# EAGLE board 8chRelay_Arduinonano (EAGLE 9.1.0)
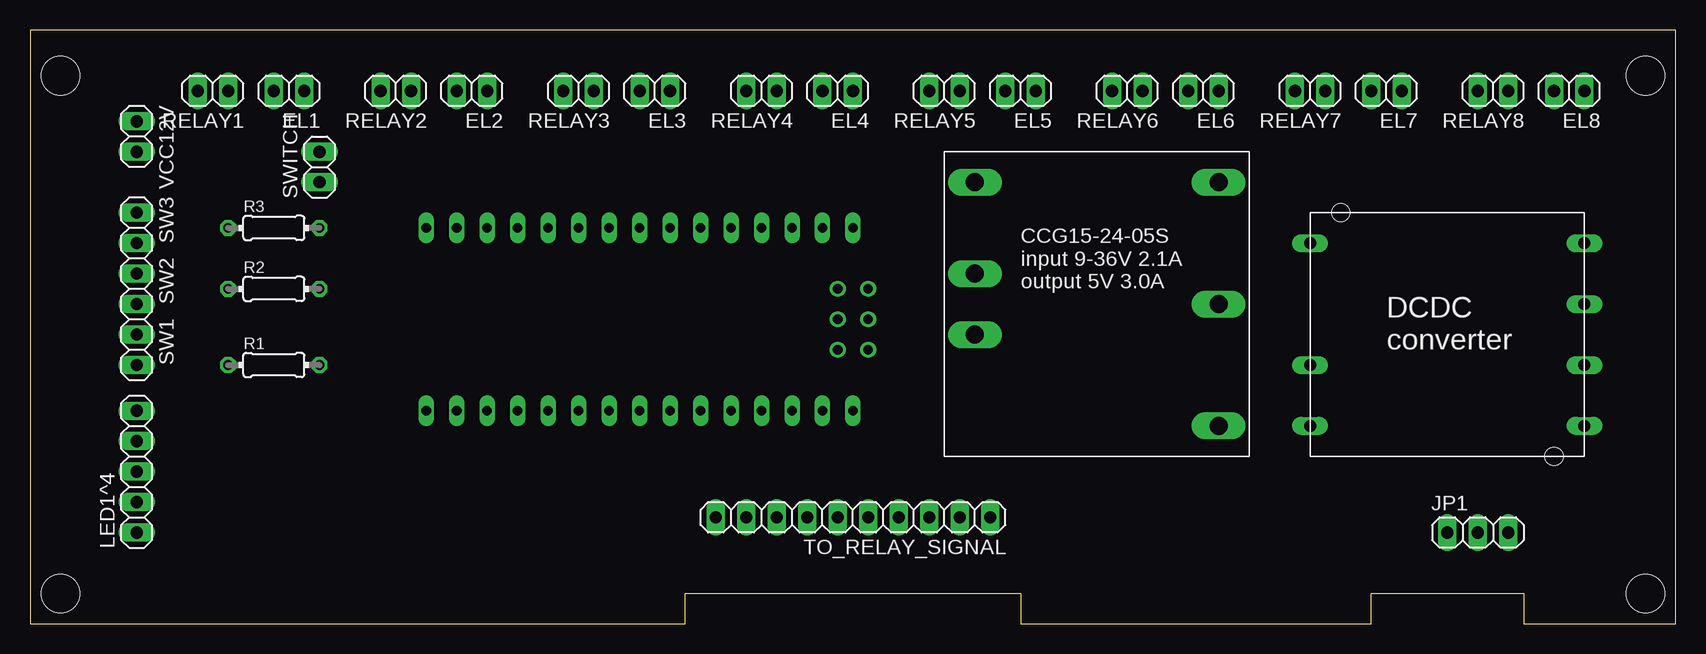
[diagram p0: board, top side]
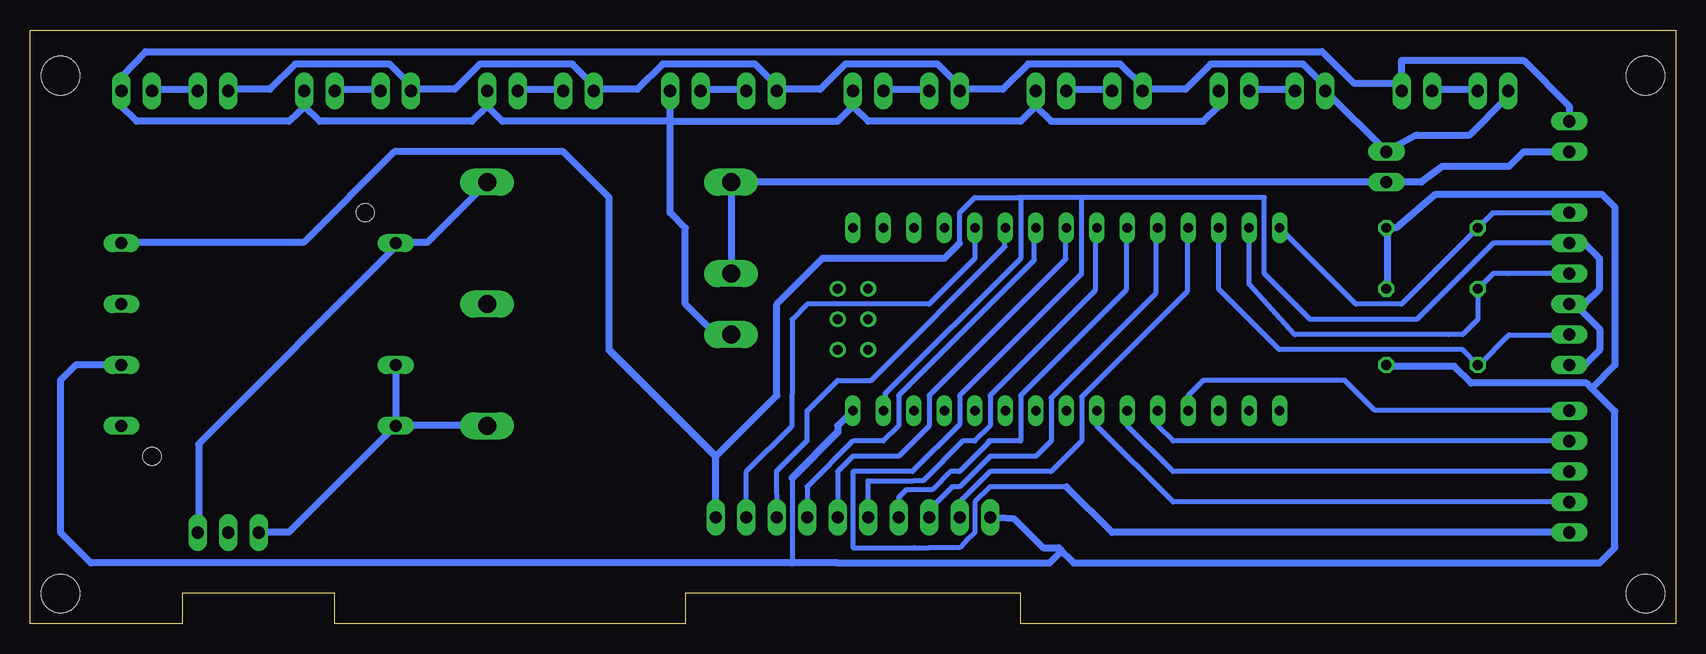
[diagram p1: board, bottom side, seen from below]

Size 137.16 x 49.53 mm. Coordinates in mm from the lower left corner, seen from the top.
Outline: 137.16,0 137.16,49.53 0,49.53 0,0 54.61,0 54.61,2.54 82.55,2.54 82.55,0 111.76,0 111.76,2.54 123.19,2.54 124.46,2.54 124.46,0 137.16,0
Copper layers (1*16): Top 0.035mm / dielectric 1.5mm / Bottom 0.035mm
Design rules "default": minimum track width 6mil, minimum drill 0.35mm, track to track 6mil, track to pad 6mil, pad to pad 6mil, via to via 6mil, smd to smd 6mil, copper to edge 40mil, drill to drill 6mil, minimum pad ring 10mil, minimum via ring 8mil, stop-mask expansion 4mil, vias tented up to drill 0mil, thermal gap 10mil
Net classes: 0 default: width 0.4 mm, clearance 0.3 mm; 1 vcc: width 0.6 mm, clearance 0.4 mm; 2 GND: width 0.6 mm, clearance 0.4 mm
Holes 3.2 mm at 2.54,2.54 2.54,45.72 134.62,2.54 134.62,45.72

## Footprints (pad centres in the part's own frame; a part is rotated, then mirrored left to right if it is on the bottom)
DC_DC_CONVERTER = drill 1 long: +VIN -11.43,6.35; +VOUT 11.43,6.35; -VIN -11.43,-8.89; -VOUT 11.43,-3.81; P$4 11.43,-8.89; RC -11.43,-3.81; TRM 11.43,1.27 | hole 1.5: -8.89,8.89; 8.89,-11.43
1X02 = drill 1.016 long: 1 -1.27,0; 2 1.27,0
1X03 = drill 1.016 long: 1 -2.54,0; 2 0,0; 3 2.54,0
1X05 = drill 1.016 long: 1 -5.08,0; 2 -2.54,0; 3 0,0; 4 2.54,0; 5 5.08,0
0204/7 = drill 0.813 octagon: 1 -3.81,0; 2 3.81,0
1X10 = drill 1.016 long: 1 -11.43,0; 2 -8.89,0; 3 -6.35,0; 4 -3.81,0; 5 -1.27,0; 6 1.27,0; 7 3.81,0; 8 6.35,0; 9 8.89,0; 10 11.43,0
NANO = drill 0.8 long: 3.3V -10.16,24.13; 5V -10.16,-1.27; A0 -10.16,19.05; A1 -10.16,16.51; A2 -10.16,13.97; A3 -10.16,11.43; A4 -10.16,8.89; A5 -10.16,6.35; A6 -10.16,3.81; A7 -10.16,1.27; AREF -10.16,21.59; D2 5.08,1.27; D3 5.08,3.81; D4 5.08,6.35; D5 5.08,8.89; D6 5.08,11.43; D7 5.08,13.97; D8 5.08,16.51; D9 5.08,19.05; D10 5.08,21.59; D11 5.08,24.13; D12 5.08,26.67; D13 -10.16,26.67; GND -10.16,-6.35; GND1 5.08,-1.27; RAW -10.16,-8.89; RST -10.16,-3.81; RST1 5.08,-3.81; RX1 5.08,-6.35; TX0 5.08,-8.89 | drill 0.8: ICSP1 -5.08,-10.16; ICSP2 -5.08,-7.62; ICSP3 -2.54,-10.16; ICSP4 -2.54,-7.62; ICSP5 0,-10.16; ICSP6 0,-7.62
CCG15-24-05S = drill 1.5 long: +VIN -10.16,-1.27; +VOUT 10.16,11.43; -VIN -10.16,3.81; -VOUT 10.16,-8.89; RC -10.16,11.43; TRM 10.16,1.27

## Placement (x,y rotation side)
DC-DC1  DC-DC-CONVERTER  [DC_DC_CONVERTER]  118.11,25.4 0 top
EL1  [1X02]  21.59,44.45 180 top
EL2  [1X02]  36.83,44.45 180 top
EL3  [1X02]  52.07,44.45 180 top
EL4  [1X02]  67.31,44.45 180 top
EL5  [1X02]  82.55,44.45 180 top
EL6  [1X02]  97.79,44.45 180 top
EL7  [1X02]  113.03,44.45 180 top
EL8  [1X02]  128.27,44.45 180 top
JP1  [1X03]  120.65,7.62 0 top
LED1^4  [1X05]  8.89,12.7 90 top
R1  10k  [0204/7]  20.32,21.59 0 top
R2  10k  [0204/7]  20.32,27.94 0 top
R3  10k  [0204/7]  20.32,33.02 0 top
RELAY1  [1X02]  15.24,44.45 180 top
RELAY2  [1X02]  30.48,44.45 180 top
RELAY3  [1X02]  45.72,44.45 180 top
RELAY4  [1X02]  60.96,44.45 180 top
RELAY5  [1X02]  76.2,44.45 180 top
RELAY6  [1X02]  91.44,44.45 180 top
RELAY7  [1X02]  106.68,44.45 180 top
RELAY8  [1X02]  121.92,44.45 180 top
SW1  [1X02]  8.89,22.86 270 top
SW2  [1X02]  8.89,27.94 270 top
SW3  [1X02]  8.89,33.02 270 top
SWITCH  [1X02]  24.13,38.1 90 top
TO_RELAY_SIGNAL  [1X10]  68.58,8.89 180 top
U$1  NANO  [NANO]  59.69,27.94 90 top
U$2  CCG15-24-05S  [CCG15-24-05S]  88.9,25.4 0 top
VCC12V  [1X02]  8.89,40.64 270 top

## Library data of the parts
DC-DC1 = dc-dc-converter_CC6-0505SF-E
EL1-EL8 JP1 LED1^4 RELAY1-RELAY8 SW1-SW3 SWITCH TO_RELAY_SIGNAL VCC12V = pinhead
R1-R3 = rcl; SPICEPREFIX: R
U$1 = Arduino-clone
U$2 = dc-dc-converter_CCG15-24-05S

## Nets
N$1 [vcc]: RELAY1.2 RELAY2.2 RELAY3.2 RELAY4.2 RELAY5.2 RELAY6.2 RELAY7.2 RELAY8.2 SWITCH.2
N$2 [GND]: EL1.2 RELAY1.1
N$3 [GND]: EL2.2 RELAY2.1
N$4 [GND]: EL3.2 RELAY3.1
N$5 [GND]: EL4.2 RELAY4.1
N$6 [GND]: EL5.2 RELAY5.1
N$7 [GND]: EL6.2 RELAY6.1
N$8 [GND]: EL7.2 RELAY7.1
N$9 [GND]: EL8.2 RELAY8.1
N$10 [GND]: EL1.1 EL2.1 EL3.1 EL4.1 EL5.1 EL6.1 EL7.1 EL8.1 U$2.+VIN VCC12V.1
N$11 [GND]: DC-DC1.-VIN DC-DC1.RC JP1.1 U$2.-VOUT
N$12 [vcc]: SWITCH.1 U$2.-VIN U$2.RC VCC12V.2
N$13: TO_RELAY_SIGNAL.2 U$1.D2
N$14: TO_RELAY_SIGNAL.3 U$1.D3
N$15: TO_RELAY_SIGNAL.4 U$1.D4
N$16: TO_RELAY_SIGNAL.5 U$1.D5
N$17: TO_RELAY_SIGNAL.6 U$1.D6
N$18: TO_RELAY_SIGNAL.7 U$1.D7
N$19: TO_RELAY_SIGNAL.8 U$1.D8
N$20: TO_RELAY_SIGNAL.9 U$1.D9
N$21: R3.1 SW3.1 U$1.D12
N$22: R2.1 SW2.1 U$1.D11
N$23: R1.1 SW1.1 U$1.D10
N$24: LED1^4.5 U$1.A0
N$25: LED1^4.4 U$1.A1
N$26: LED1^4.3 U$1.A2
N$27: LED1^4.2 U$1.A3
N$28: DC-DC1.+VOUT LED1^4.1 SW1.2 SW2.2 SW3.2 TO_RELAY_SIGNAL.1 U$1.GND
N$29: DC-DC1.-VOUT R1.2 R2.2 R3.2 TO_RELAY_SIGNAL.10 U$1.RAW
N$32 [GND]: DC-DC1.+VIN JP1.3 U$2.+VOUT

## Tracks (layer width: path | path; a pad name or v marks a point on that pad's centre or on a via)
N$1
  Bottom 0.6: RELAY1.2 14.09,44.41 14.09,43.88 17.2,40.77 21.63,40.77 SWITCH.2 24.24,39.51 29.14,44.41 RELAY2.2 29.14,44.76 31.07,46.68 38.77,46.68 40.87,44.58 44.37,44.58 RELAY3.2 44.37,44.76 46.29,46.68 53.99,46.68 56.09,44.58 59.59,44.58 RELAY4.2 59.59,44.76 61.52,46.68 69.22,46.68 71.31,44.58 74.81,44.58 RELAY5.2 74.81,44.76 76.74,46.68 84.44,46.68 86.54,44.58 90.04,44.58 RELAY6.2 90.04,44.76 91.97,46.68 99.67,46.68 101.77,44.58 105.27,44.58 RELAY7.2 105.27,44.76 107.19,46.68 115.06,46.68 117.17,44.58 120.49,44.58 RELAY8.2
N$2
  Bottom 0.6: RELAY1.1 16.54,44.58 20.21,44.58 EL1.2
N$3
  Bottom 0.6: RELAY2.1 31.77,44.58 35.44,44.58 EL2.2
N$4
  Bottom 0.6: RELAY3.1 46.99,44.58 50.66,44.58 EL3.2
N$5
  Bottom 0.6: RELAY4.1 62.39,44.58 65.89,44.58 EL4.2
N$6
  Bottom 0.6: RELAY5.1 77.61,44.58 81.11,44.58 EL5.2
N$7
  Bottom 0.6: RELAY6.1 92.84,44.58 96.52,44.58 EL6.2
N$8
  Bottom 0.6: RELAY7.1 108.06,44.58 111.74,44.58 EL7.2
N$9
  Bottom 0.6: RELAY8.1 123.29,44.58 126.97,44.58 EL8.2
N$10
  Bottom 0.6: 53.34,43.18 52.07,41.91 39.37,41.91 38.1,43.18 EL2.1 | EL3.1 53.34,43.18 | 68.58,43.18 67.31,41.91 54.61,41.91 53.34,43.18 | VCC12V.1 8.89,43.18 12.7,46.99 22.86,46.99 EL1.1 23.02,45.1 26.86,45.1 29.49,47.73 127.53,47.73 129.43,45.72 129.54,45.72 EL8.1 129.54,43.18 128.27,41.91 115.57,41.91 114.27,43.15 114.3,43.18 | 83.82,41.91 83.82,34.29 82.55,33.02 82.55,26.67 80.01,24.13 U$2.+VIN | 83.82,41.91 EL5.1 | 83.82,41.91 97.79,41.91 98.97,43.09 98.97,44.41 EL6.1 99.06,43.18 100.33,41.91 113.03,41.91 114.3,43.18 | 68.58,43.18 69.85,41.91 83.82,41.91 | 114.3,43.18 EL7.1 | 68.58,43.18 EL4.1
N$11
  Bottom 0.6: DC-DC1.-VIN 106.67,16.58 106.67,21.48 DC-DC1.RC | JP1.1 118.04,7.66 115.59,7.66 106.84,16.41 DC-DC1.-VIN | U$2.-VOUT 99.14,16.58 106.49,16.58 DC-DC1.-VIN
N$12
  Bottom 0.6: VCC12V.2 12.7,39.37 13.92,38.15 19.49,38.15 21.21,36.83 SWITCH.1 U$2.RC U$2.-VIN
N$13
  Bottom 0.4: U$1.D2 58.42,30.48 62.23,26.67 72.39,26.67 73.66,25.4 73.66,19.12 73.66,16.51 77.47,12.7 TO_RELAY_SIGNAL.2
N$14
  Bottom 0.4: U$1.D3 55.91,32.85 55.91,31.45 67.05,20.32 69.85,20.32 72.39,17.78 72.39,15.28 74.95,12.72 TO_RELAY_SIGNAL.3
N$15
  Bottom 0.4: U$1.D4 53.47,32.85 53.47,30.36 64.77,19.05 64.77,16.51 66.04,15.24 68.58,15.24 72.39,11.43 TO_RELAY_SIGNAL.4
N$16
  Bottom 0.4: U$1.D5 50.84,32.85 50.84,30.44 62.23,19.05 62.23,16.51 64.77,13.97 68.58,13.97 69.85,12.7 TO_RELAY_SIGNAL.5
N$17
  Bottom 0.4: U$1.D6 48.39,32.85 48.39,27.81 57.15,19.05 57.15,16.51 58.42,15.24 59.44,15.24 62.74,11.94 63.5,11.94 67.31,11.94 TO_RELAY_SIGNAL.6
N$18
  Bottom 0.4: U$1.D7 45.77,32.85 45.77,27.89 54.61,19.05 54.61,15.24 57.15,15.24 | 57.15,15.24 57.28,15.24 | TO_RELAY_SIGNAL.7 64.77,10.54 64.14,11.18 61.98,11.18 60.45,12.7 59.69,12.7 57.15,15.24
N$19
  Bottom 0.4: U$1.D8 43.31,32.85 43.31,27.61 52.06,18.86 52.06,15.24 53.34,13.97 57.15,13.97 59.69,11.43 60.33,11.43 62.23,9.53 TO_RELAY_SIGNAL.8
N$20
  Bottom 0.4: U$1.D9 40.69,32.85 40.69,27.78 49.53,18.94 49.53,15.24 52.07,12.7 57.15,12.7 59.69,10.16 TO_RELAY_SIGNAL.9 59.73,9.05
N$21
  Bottom 0.4: U$1.D12 32.99,32.85 32.85,32.85 26.67,26.67 22.86,26.67 R3.1 15.24,34.29 SW3.1
N$22
  Bottom 0.4: 18.96,24.13 31.75,24.13 35.56,28.34 U$1.D11 | SW2.1 13.97,29.21
  Bottom 0.406: 13.97,29.21 15.24,29.21 R2.1 16.51,25.4 17.78,24.13 18.96,24.13
N$23
  Bottom 0.4: SW1.1 9.02,24.11 13.91,24.11 16.36,21.66 R1.1 16.54,21.66 17.77,22.88 33.04,22.88 38.1,27.94 U$1.D10
N$24
  Bottom 0.4: LED1^4.5 9.02,17.8 25.08,17.8 27.59,20.32 39.37,20.32 40.64,19.05 U$1.A0
N$25
  Bottom 0.4: 43.18,16.51 | 43.18,16.51 41.91,15.24 LED1^4.4 | 43.18,16.51 | 43.18,16.51 U$1.A1
N$26
  Bottom 0.4: LED1^4.3 41.91,12.7 45.72,16.51 U$1.A2
N$27
  Bottom 0.4: LED1^4.2 41.91,10.16 48.26,16.51 U$1.A3
N$28
  Bottom 0.4: 54.61,35.56 54.61,30.48 65.89,19.2 65.89,17.8 U$1.GND | 54.78,35.56 58.42,35.56 59.69,34.29 59.69,31.75 | 50.8,11.43 57.16,11.43 58.42,10.17 58.42,7.61 59.17,6.87 59.69,6.35 62.24,6.35 63.5,6.35 68.58,6.35 68.58,12.7 63.63,12.7 59.69,16.64 59.69,19.05 49.53,29.21 49.53,35.56
  Bottom 0.406: SW3.2 15.24,31.75 21.59,25.4 30.48,25.4 34.29,29.21 34.29,35.56 49.53,35.56 54.61,35.56 54.78,35.56
  Bottom 0.6: SW1.2 8.84,21.66 7.55,21.66 6.35,22.86 6.35,24.59 8.31,26.55 8.84,26.55 SW2.2 7.51,26.78 6.35,27.94 6.35,30.48 7.5,31.63 8.84,31.63 SW3.2 | 88.91,22.86 88.91,35.57 92.71,39.37 106.8,39.37 114.36,31.8 129.41,31.8 DC-DC1.+VOUT | 59.69,31.75 60.96,30.48 71.12,30.48 74.93,26.67 74.93,19.05 80.01,13.97 TO_RELAY_SIGNAL.1 | LED1^4.1 46.99,7.62 50.8,11.43
  Bottom 0.61: 80.01,13.97 88.9,22.86 88.91,22.86
N$29
  Bottom 0.406: 73.66,12.19 73.66,5.08
  Bottom 0.6: 7.01,19.66 5.08,21.59 5.08,34.74 6.17,35.83 20.04,35.83 23.36,33.02 R3.2 24.07,32.73 24.07,28 R2.2 | R1.2 24.07,21.48 18.46,21.48 17.07,20.08 7.44,20.08 7.01,19.66 | TO_RELAY_SIGNAL.10 55.13,8.75 52.73,6.35 51.46,6.35 | 69.85,16 69.85,16.51 U$1.RAW | DC-DC1.-VOUT 133.35,21.59 134.62,20.32 134.62,7.62 132.08,5.08 73.66,5.08 69.85,5.08 52.19,5.08 51.19,6.08 51.46,6.35 | 51.46,6.35 50.19,5.08 6.35,5.08 5.08,6.35 5.08,17.72 7.01,19.66
  Bottom 0.61: 69.85,16 73.66,12.19
N$32
  Bottom 0.6: U$2.+VOUT 99.14,36.7 104.04,31.8 106.67,31.8 DC-DC1.+VIN 106.67,31.45 123.11,15.01 123.11,7.66 JP1.3